# Altium PCB waffling60-MXHS.PcbDoc (part 2 of 3)
Units mm, origin at the board's own origin, x right, y up, seen from the top; angles counter-clockwise.
Board outline 284.81 x 94.3 mm, 2 copper layers (Component Side, Bottom Layer), stack 1.571 mm thick; 157 components, 101 nets, 956 pads, 124 vias.
Unrouted connection lines stored in the file: 1.
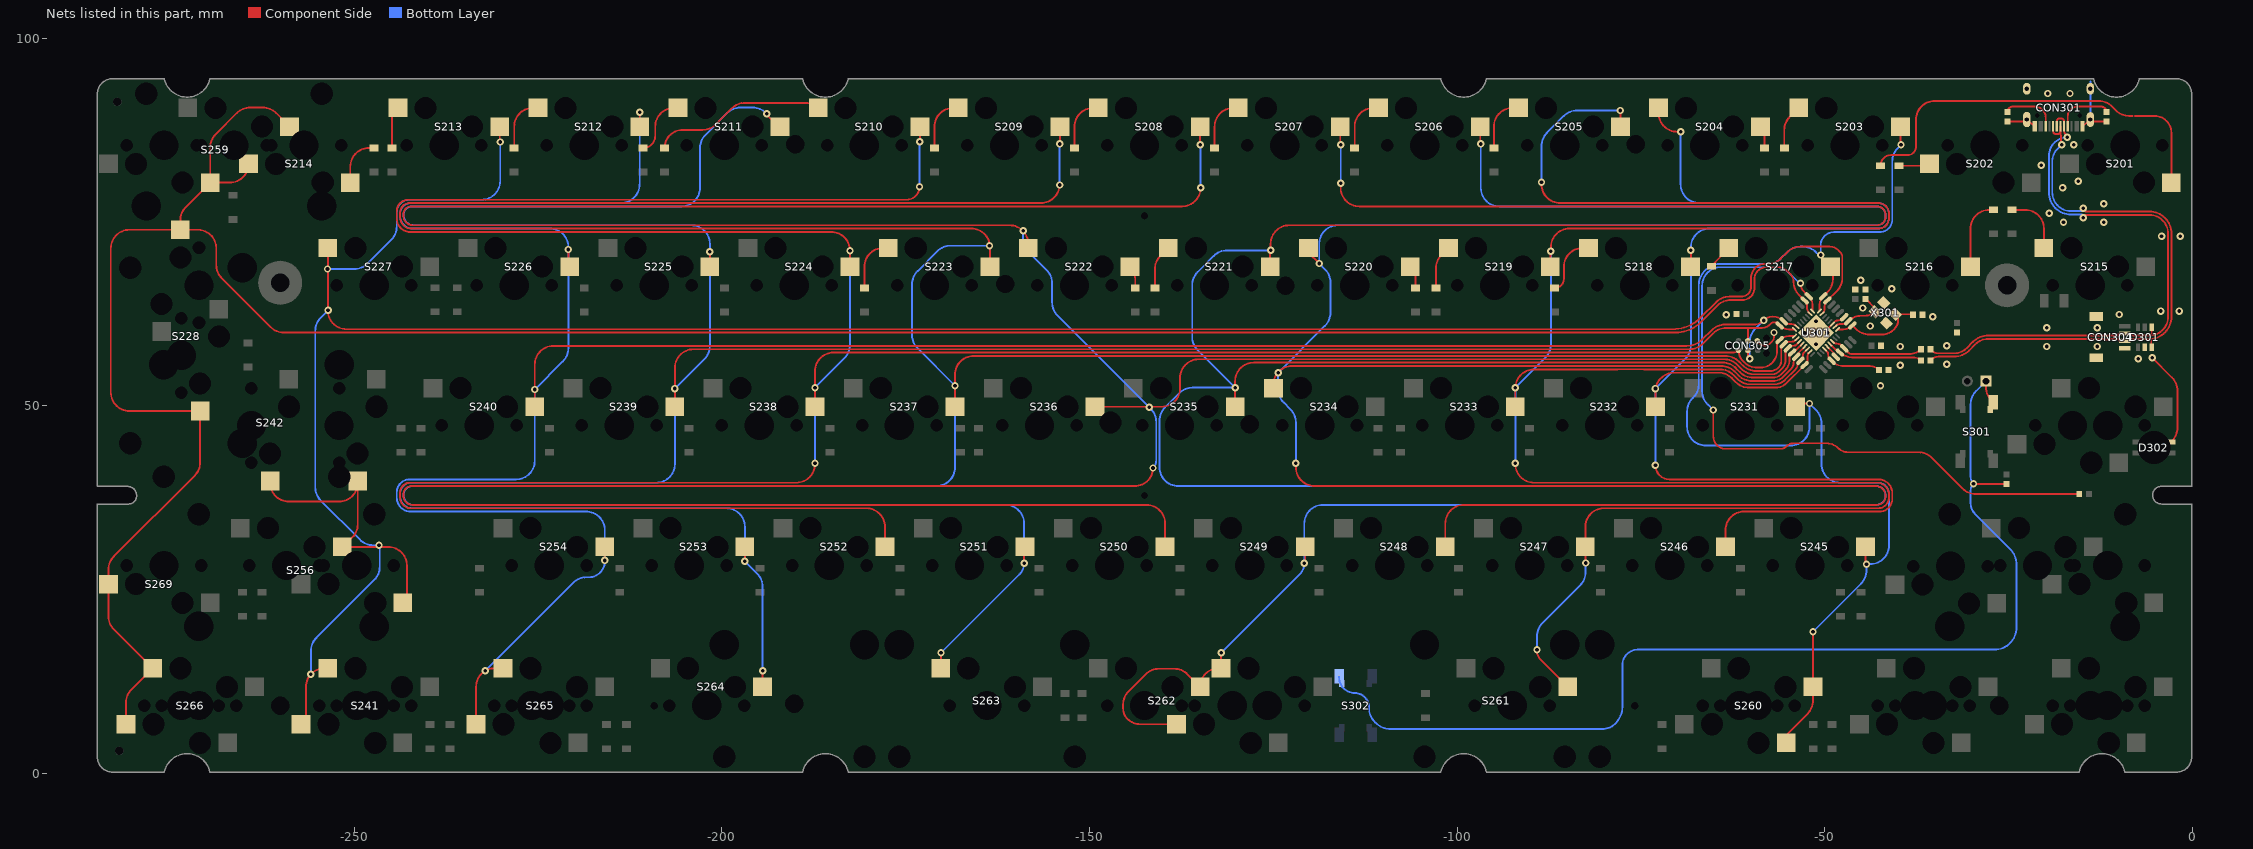
[diagram p2: the nets of this part, all layers, seen from the top]

## Via types
v1: diameter 1, hole 0.5, Component Side to Bottom Layer, tented both sides, 119 vias
v2: diameter 1, hole 0.5, Component Side to Bottom Layer, tented bottom, 5 vias

## Nets (pads, with @x,y where several pads share a name; then routed paths per layer and width w, separated by ;. In a path a pad name is that pad's centre, name@x,y a point inside that pad or via, vN(x,y) a via of type N, cw(c..) or ccw(c..) an arc to the next point about the centre after c; other vN are vias at no path point) (continued)
col3: S203.2 S217.2 S231.2 S245.2 S260.2 U301.8 | length 161.5
  Component Side w0.254: S260.2@-55.247,4.135 -55.247,5.205 -52.34,8.112 ccw(c-54.136,9.908) -51.596,9.908 S260.2@-51.596,11.755 v1(-51.596,19.27) ; S231.2@-53.977,49.855 -53.54,50.292 v1(-52.07,50.292) ; U301.8@-50.725,62.852 -50.725,63.587 cw(c-48.914,63.587) U301.8@-50.194,64.868 -49.639,65.423 ccw(c-51.435,67.219) -48.895,67.219 -48.895,68.132 ccw(c-49.988,68.132) S217.2@-49.215,68.905 -50.546,70.236 v1(-50.546,70.485) ; S245.2@-44.452,30.805 -44.452,28.577 ccw(c-44.323,28.577) v1(-44.323,28.448) ; S203.2@-39.69,87.955 -39.69,85.537 ccw(c-39.624,85.537) v1(-39.624,85.471)
  Bottom Layer w0.254: v1(-51.596,19.27) -45.067,25.799 ccw(c-46.863,27.595) -44.323,27.595 v1(-44.323,28.448) -43.805,28.448 ccw(c-43.805,30.988) -41.265,30.988 -41.265,37.978 ccw(c-42.812,37.978) -41.43,38.674 ccw(c-42.812,37.978) -42.116,39.36 ccw(c-42.812,37.978) -42.812,39.525 -47.897,39.525 cw(c-47.897,42.065) -50.437,42.065 -50.437,47.607 ccw(c-52.977,47.607) -51.181,49.403 v1(-52.07,50.292) -52.07,47.117 cw(c-54.61,47.117) -54.61,44.577 -66.167,44.577 cw(c-66.167,47.117) -68.707,47.117 -68.707,49.24 cw(c-66.167,49.24) -67.963,51.036 -67.818,51.181 ccw(c-69.481,52.844) -67.129,52.844 -67.129,66.421 cw(c-64.589,66.421) -66.731,67.786 ccw(c-66.945,67.923) -66.725,67.795 cw(c-64.135,66.294) -64.277,69.285 cw(c-64.135,66.294) -64.135,69.288 -57.748,69.288 ccw(c-57.748,71.828) -55.952,70.032 -55.1,70.884 cw(c-53.304,69.088) -53.304,71.628 -52.99,71.628 cw(c-52.99,69.088) -51.194,70.884 v1@-50.743,70.433 ; v1(-50.546,70.485) -50.546,71.815 cw(c-48.759,71.815) -50.222,72.841 cw(c-48.759,71.815) -48.759,73.602 cw(c-48.382,71.09) -48.382,73.63 -42.497,73.63 ccw(c-42.497,75.316) -42.026,73.697 ccw(c-42.497,75.316) -40.878,74.845 ccw(c-42.497,75.316) -40.811,75.316 -40.811,83.232 cw(c-38.271,83.232) -40.067,85.028 v1(-39.624,85.471)
col4: S204.2 S218.2 S232.2 S246.2 U301.23 | length 196.7
  Component Side w0.254: S232.2@-73.027,49.855 -73.027,51.943 cw(c-70.487,51.943) -70.487,54.483 -64.425,54.483 cw(c-64.425,51.943) -62.629,53.739 -62.085,53.195 ccw(c-60.289,54.991) -60.289,52.451 -56.64,52.451 ccw(c-56.64,54.424) -55.254,53.02 ; v1(-73.025,41.91) ccw(c-71.094,41.91) -71.094,39.979 -42.695,39.979 cw(c-42.695,38.095) -41.932,39.818 cw(c-42.695,38.095) -40.972,38.858 cw(c-42.695,38.095) -40.811,38.095 -40.811,37.343 cw(c-42.553,37.343) -40.899,36.795 cw(c-42.553,37.343) -42.005,35.689 cw(c-42.553,37.343) -42.553,35.601 -60.962,35.601 ccw(c-60.962,33.061) -63.502,33.061 S246.2@-63.502,30.805 ; S204.2@-72.59,90.495 -72.59,89.789 ccw(c-70.05,89.789) -70.05,87.249 v1(-69.596,87.249) ; S218.2@-68.265,68.905 -68.199,68.971 v1(-68.199,71.12) ; -55.245,53.029 cw(c-56.64,54.424) -55.254,53.02 ; U301.23@-51.997,57.337 -52.153,57.181 ccw(c-51.741,56.769) -52.324,56.769 -52.324,56.321 cw(c-53.141,56.321) -52.563,55.743 cw(c-53.689,56.515) -52.724,55.55 U301.23@-52.74,55.534 -55.254,53.02
  Bottom Layer w0.254: v1(-73.025,41.91) v1(-73.025,52.324) -68.943,56.406 ccw(c-70.739,58.202) -68.199,58.202 v1(-68.199,71.12) -68.199,71.544 cw(c-65.659,71.544) -65.659,74.084 -42.685,74.084 ccw(c-42.685,75.504) -42.194,74.172 ccw(c-42.685,75.504) -41.353,75.013 ccw(c-42.685,75.504) -41.265,75.504 -41.265,76.134 ccw(c-42.685,76.134) -41.353,76.625 ccw(c-42.685,76.134) -42.194,77.466 ccw(c-42.685,76.134) -42.685,77.554 -67.056,77.554 cw(c-67.056,80.094) -69.596,80.094 v1(-69.596,87.249)
col5: pad.@-75.692,85.542 S205.2 S219.2 S233.2 S247.2 S261.2 U301.22 | length 321.8
  Component Side w0.254: v1@-92.266,42.355 v1(-92.075,42.164) -92.075,42.065 ccw(c-89.535,42.065) -89.535,39.525 -42.883,39.525 cw(c-42.883,37.907) -42.051,39.295 cw(c-42.883,37.907) -41.495,38.739 cw(c-42.883,37.907) -41.265,37.907 -41.265,37.531 cw(c-42.741,37.531) -41.383,36.954 cw(c-42.741,37.531) -42.164,36.173 cw(c-42.741,37.531) -42.741,36.055 -80.012,36.055 ccw(c-80.012,33.515) -80.16,36.051 ccw(c-80.012,33.515) -82.548,33.663 ccw(c-80.012,33.515) -82.552,33.515 S247.2@-82.552,30.805 v1@-82.552,28.831 ; S233.2@-92.077,49.855 -92.077,52.389 cw(c-89.537,52.389) -89.537,54.929 -78.144,54.929 -78.121,54.951 -74.631,54.951 -74.616,54.937 -64.237,54.937 cw(c-64.237,52.397) -62.441,54.193 -61.897,53.649 ccw(c-60.101,55.445) -60.101,52.905 -56.702,52.905 ccw(c-56.896,55.012) -55.4,53.516 -54.029,54.887 ; v1@-89.154,16.764 ccw(c-87.251,16.764) -88.597,15.418 S261.2@-84.933,11.755 ; v1(-88.519,80.391) -88.519,80.094 ccw(c-85.979,80.094) -85.979,77.554 -42.685,77.554 cw(c-42.685,76.134) -42.194,77.466 cw(c-42.685,76.134) -41.353,76.625 cw(c-42.685,76.134) -41.265,76.134 -41.265,75.504 cw(c-42.685,75.504) -41.353,75.013 cw(c-42.685,75.504) -42.194,74.172 cw(c-42.685,75.504) -42.685,74.084 -84.709,74.084 ccw(c-84.709,71.544) -87.249,71.544 v1(-87.249,70.993) ; S219.2@-87.315,68.905 v1@-87.315,70.927 ; S205.2@-77.79,87.955 v1(-77.79,90.15) ; -54.028,54.888 ccw(c-54.961,55.82) U301.22@-53.642,55.82 ; U301.22@-53.306,56.1 -53.294,56.111 ccw(c-54.078,56.896) -52.969,56.896 cw(c-52.542,56.896) -52.844,57.198 U301.22@-52.351,57.691
  Bottom Layer w0.254: v1(-92.075,42.164) v1(-92.075,52.451) -87.993,56.533 ccw(c-89.789,58.329) -87.249,58.329 v1(-87.249,70.993) ; v1(-89.121,16.797) -89.121,18.666 cw(c-86.581,18.666) -88.377,20.462 -83.261,25.578 ccw(c-85.057,27.374) -82.517,27.374 v1(-82.517,28.608) ; v1(-88.519,80.391) -88.519,85.308 cw(c-85.979,85.308) -87.775,87.104 -85.473,89.406 cw(c-83.677,87.61) -83.677,90.15 v1(-77.79,90.15)
col6: S206.2 S220.2 S234.2 S248.2 U301.21 | length 406.7
  Component Side w0.254: S234.2@-124.977,52.395 -124.977,52.865 cw(c-122.437,52.865) -122.437,55.405 -74.443,55.405 -74.428,55.391 -64.049,55.391 cw(c-64.049,52.851) -62.253,54.647 -61.709,54.103 ccw(c-59.913,55.899) -59.913,53.359 -56.836,53.359 ccw(c-57.023,55.318) -55.631,53.927 -54.673,54.885 ; v1(-121.92,42.164) -121.92,41.611 ccw(c-119.38,41.611) -119.38,39.071 -43.071,39.071 cw(c-43.071,37.719) -41.719,37.719 cw(c-42.929,37.719) -41.907,37.072 cw(c-42.929,37.719) -42.282,36.697 cw(c-42.929,37.719) -42.929,36.509 -99.062,36.509 ccw(c-99.062,33.969) -101.602,33.969 S248.2@-101.602,30.805 ; S220.2@-120.215,71.445 -120.215,70.812 v1(-118.745,69.342) ; S206.2@-96.84,87.955 -96.84,85.664 ccw(c-96.774,85.664) v1(-96.774,85.598) ; -54.672,54.886 ccw(c-55.795,56.007) -54.208,56.007 U301.21@-54.208,56.385 ; U301.21@-53.871,56.665 cw(c-53.359,56.665) -53.721,57.027 U301.21@-52.705,58.044
  Bottom Layer w0.254: v1@-121.92,42.037 v1(-121.92,42.164) -121.92,47.716 ccw(c-124.46,47.716) -122.664,49.512 -123.589,50.437 cw(c-121.793,52.233) -124.333,52.233 v1(-124.333,54.483) -117.965,60.851 ccw(c-119.761,62.647) -117.221,62.647 -117.221,66.766 ccw(c-119.761,66.766) -117.965,68.562 v1(-118.745,69.342) -118.745,71.998 cw(c-116.205,71.998) -118.744,72.072 cw(c-116.205,71.998) -116.279,74.537 cw(c-116.205,71.998) -116.205,74.538 -42.873,74.538 ccw(c-42.873,75.692) -42.338,74.67 ccw(c-42.873,75.692) -41.851,75.157 ccw(c-42.873,75.692) -41.719,75.692 -41.719,75.946 ccw(c-42.873,75.946) -41.851,76.481 ccw(c-42.873,75.946) -42.338,76.968 ccw(c-42.873,75.946) -42.873,77.1 -94.234,77.1 cw(c-94.234,79.64) -96.774,79.64 v1(-96.774,85.598)
col7: S207.2 S221.2 S235.2 S249.2 S262.1 U301.20 | length 542.1
  Component Side w0.254: S262.1@-138.463,6.675 -143.037,6.675 cw(c-143.037,9.215) -144.833,7.419 cw(c-143.428,8.824) -145.415,8.824 -145.415,9.362 cw(c-142.875,9.362) -144.671,11.158 -142.349,13.48 cw(c-140.553,11.684) -140.553,14.224 -138.461,14.224 cw(c-138.461,11.684) -136.665,13.48 S262.1@-134.939,11.755 cw(c-132.399,11.755) -132.399,14.295 S262.1@-132.113,14.295 -132.113,16.35 v1(-132.08,16.383) ; S235.2@-130.177,49.855 -130.177,52.451 -130.177,53.319 cw(c-127.637,53.319) -127.637,55.859 -63.875,55.859 cw(c-63.875,53.319) -62.079,55.116 -61.521,54.557 ccw(c-59.725,56.353) -59.725,53.813 -57.023,53.813 ccw(c-57.023,55.349) -55.937,54.263 -55.354,54.846 ccw(c-56.755,56.247) -54.774,56.247 U301.20@-54.774,56.951 ; S221.2@-125.415,68.905 -125.415,71.054 v1(-125.349,71.12) -125.349,71.998 cw(c-122.809,71.998) -122.809,74.538 -42.873,74.538 ccw(c-42.873,75.692) -42.338,74.67 ccw(c-42.873,75.692) -41.851,75.157 ccw(c-42.873,75.692) -41.719,75.692 -41.719,75.946 ccw(c-42.873,75.946) -41.851,76.481 ccw(c-42.873,75.946) -42.338,76.968 ccw(c-42.873,75.946) -42.873,77.1 -113.284,77.1 cw(c-113.284,79.64) -115.824,79.64 v1(-115.824,80.264) ; S249.2@-120.652,30.805 -120.652,28.577 v1@-120.65,28.575 ; S207.2@-115.89,87.955 -115.89,85.537 ccw(c-115.824,85.537) v1(-115.824,85.471) ; U301.20@-54.437,57.231 ccw(c-54.437,57.743) -54.075,57.381 U301.20@-53.058,58.398
  Bottom Layer w0.254: v1(-132.08,16.383) -121.406,27.057 ccw(c-122.923,28.575) v1(-120.777,28.575) -120.777,33.969 cw(c-118.237,33.969) -118.237,36.509 -43,36.509 ccw(c-43,37.79) -42.096,36.883 ccw(c-43,37.79) -42.093,36.886 ccw(c-43,37.79) -41.719,37.79 ccw(c-43,37.79) -42.092,38.694 ccw(c-43,37.79) -42.096,38.698 ccw(c-43,37.79) -43,39.071 -137.922,39.071 cw(c-137.922,41.611) -140.462,41.611 -140.462,47.97 cw(c-137.922,47.97) -139.718,49.766 -137.777,51.707 cw(c-135.981,49.911) -135.981,52.451 v1(-130.175,52.451) -135.273,57.549 cw(c-133.477,59.345) -136.017,59.345 -136.017,66.385 cw(c-133.477,66.385) -135.273,68.181 -133.078,70.376 cw(c-131.282,68.58) -131.282,71.12 v1(-125.349,71.12) ; v1(-115.824,80.264) v1(-115.824,85.471)
col8: pad.@-147.123,47.742 S208.2 S222.2 S236.2 S250.2 U301.19 | length 563
  Component Side w0.254: S222.2@-158.315,71.445 -158.315,71.998 ccw(c-160.855,71.998) -160.855,74.538 -242,74.538 cw(c-242,75.819) -242.904,74.911 cw(c-242,75.819) -242.908,74.915 cw(c-242,75.819) -243.281,75.819 -243.281,76.073 cw(c-242.254,76.073) -243.226,76.405 cw(c-242.254,76.073) -242.586,77.045 cw(c-242.254,76.073) -242.254,77.1 -137.414,77.1 ccw(c-137.414,79.64) v1(-134.874,79.64) ; S236.2@-149.227,49.855 -141.859,49.855 -140.098,49.855 ccw(c-140.098,52.214) -138.43,50.546 -138.412,50.564 ccw(c-140.208,52.36) -137.668,52.36 -137.668,53.773 cw(c-135.128,53.773) -135.128,56.313 -63.687,56.313 cw(c-63.687,53.773) -61.891,55.57 -61.333,55.011 ccw(c-59.537,56.807) -59.537,54.267 -57.269,54.267 ccw(c-57.269,55.999) -56.225,54.617 -55.851,54.991 ; v1(-141.351,41.529) cw(c-143.809,41.529) -143.809,39.071 -242.183,39.071 ccw(c-242.183,37.973) -242.622,38.979 ccw(c-242.183,37.973) -243.189,38.412 ccw(c-242.183,37.973) -243.281,37.973 -243.281,37.719 ccw(c-242.071,37.719) -243.093,37.072 ccw(c-242.071,37.719) -242.718,36.697 ccw(c-242.071,37.719) -242.071,36.509 -142.242,36.509 cw(c-142.242,33.969) -139.702,33.969 S250.2@-139.702,30.805 ; S208.2@-134.94,87.955 v1(-134.94,85.503) ccw(c-134.715,85.503) v1@-134.874,85.344 ; -55.85,54.992 ccw(c-57.086,56.226) -55.339,56.226 U301.19@-55.339,57.517 ; U301.19@-54.739,58.06 U301.19@-55.003,57.797 cw(c-54.111,56.905) -54.111,58.166 -54.102,58.166 ccw(c-54.102,58.42) -53.923,58.24 U301.19@-53.412,58.751
  Bottom Layer w0.254: v1(-159.004,73.787) -159.004,72.68 ccw(c-156.464,72.68) -158.26,70.884 -155.811,68.435 cw(c-157.607,66.639) -155.067,66.639 -155.067,64.044 ccw(c-152.527,64.044) -154.323,62.248 v1(-141.859,49.784) -141.66,49.585 cw(c-143.456,47.789) -140.916,47.789 -140.916,42.579 cw(c-142.401,42.579) v1(-141.351,41.529) ; v1(-134.94,85.503) cw(c-134.94,85.437) -134.874,85.437 v1(-134.874,79.64)
col9: pad.@-161.423,66.548 S209.2 S223.2 S237.2 S251.2 S263.2 U301.18 | length 539.9
  Component Side w0.254: S263.2@-170.221,14.295 -170.18,14.336 v1(-170.18,16.383) ; S237.2@-168.277,49.855 -168.277,52.705 -168.277,54.227 cw(c-165.737,54.227) -165.737,56.767 -63.499,56.767 cw(c-63.499,54.227) -61.703,56.024 -61.145,55.465 ccw(c-59.349,57.261) -59.349,54.721 -57.37,54.721 ccw(c-57.37,56.186) -56.334,55.15 ; S223.2@-163.515,68.905 -163.515,71.544 ccw(c-166.055,71.544) -166.055,74.084 -242.188,74.084 cw(c-242.188,75.631) -242.884,74.249 cw(c-242.188,75.631) -243.57,74.935 cw(c-242.188,75.631) -243.735,75.631 -243.735,76.261 cw(c-242.442,76.261) -243.696,76.577 cw(c-242.442,76.261) -242.758,77.515 cw(c-242.442,76.261) -242.442,77.554 -156.591,77.554 ccw(c-156.591,80.094) v1@-154.051,80.094 ; v1(-158.877,28.575) -158.877,30.68 S251.2@-158.752,30.805 ; v1(-154.051,85.598) ccw(c-154.051,85.659) -153.99,85.659 S209.2@-153.99,87.955 ; -56.333,55.151 ccw(c-57.37,56.186) -55.905,56.186 U301.18@-55.905,58.082 ; U301.18@-55.568,58.363 cw(c-54.755,57.549) -54.991,58.675 cw(c-54.932,58.616) -54.932,58.699 -54.483,58.699 ccw(c-54.483,59.453) -53.95,58.92 U301.18@-53.765,59.105
  Bottom Layer w0.254: v1(-170.18,16.383) -159.506,27.057 ; v1(-163.576,71.755) -168.874,71.755 ccw(c-168.874,69.215) -170.67,71.011 -173.373,68.308 ccw(c-171.577,66.512) -174.117,66.512 -174.117,59.599 ccw(c-171.577,59.599) -173.373,57.803 v1(-168.275,52.705) -168.275,41.611 cw(c-170.815,41.611) -170.815,39.071 -242.056,39.071 ccw(c-242.056,37.846) -242.738,38.864 ccw(c-242.056,37.846) -243.074,38.528 ccw(c-242.056,37.846) -243.281,37.846 ccw(c-241.944,37.846) -241.944,36.509 -161.417,36.509 cw(c-161.417,33.969) -158.877,33.969 v1(-158.877,28.575) cw(c-161.023,28.575) -159.505,27.058 ; v1(-154.051,80.01) v1(-154.051,85.598)
col10: CON305.1 S210.2 S224.2 S238.2 S252.2 U301.17 | length 452.9
  Component Side w0.254: S238.2@-187.327,49.855 -187.327,52.451 -187.327,54.681 cw(c-184.787,54.681) -184.787,57.221 -62.469,57.221 ccw(c-62.469,58.278) CON305.1@-61.722,57.531 ccw(c-59.678,57.531) -61.124,56.086 ; v1(-187.325,42.164) -187.325,42.065 cw(c-189.865,42.065) -189.865,39.525 -242.371,39.525 ccw(c-242.371,38.161) -242.782,39.462 ccw(c-242.371,38.161) -243.672,38.572 ccw(c-242.371,38.161) -243.735,38.161 -243.735,37.531 ccw(c-242.259,37.531) -243.617,36.954 ccw(c-242.259,37.531) -242.836,36.173 ccw(c-242.259,37.531) -242.259,36.055 -180.342,36.055 cw(c-180.342,33.515) -177.802,33.515 S252.2@-177.802,30.805 ; S224.2@-182.565,68.905 v1(-182.565,71.09) ccw(c-185.105,71.09) -185.105,73.63 -242.376,73.63 cw(c-242.376,75.443) -243.028,73.751 cw(c-242.376,75.443) -244.068,74.791 cw(c-242.376,75.443) -244.189,75.443 -244.189,76.449 cw(c-242.63,76.449) -244.158,76.756 cw(c-242.63,76.449) -242.937,77.977 cw(c-242.63,76.449) -242.63,78.008 -174.849,78.008 ccw(c-174.849,79.756) v1(-173.101,79.756) ; v1@-173.101,85.852 ccw(c-173.248,85.999) -173.04,85.999 S210.2@-173.04,87.955 ; -61.123,56.086 -60.957,55.919 ccw(c-59.161,57.715) -59.161,55.175 -58.732,55.175 ccw(c-58.732,57.413) -57.151,55.83 ; -57.15,55.83 ccw(c-58.79,57.47) -56.471,57.47 U301.17@-56.471,58.648 ; U301.17@-56.134,58.928 cw(c-54.854,57.648) -54.854,59.458 U301.17@-54.119,59.458
  Bottom Layer w0.254: v1(-187.325,42.164) v1(-187.325,52.451) -183.309,56.467 ccw(c-185.105,58.263) -182.565,58.263 v1(-182.565,71.09) ; v1(-173.101,79.756) -173.101,80.645 ; v1(-173.068,85.885) -173.101,85.852 -173.101,80.645 ; -173.101,80.645 ccw(c-173.101,80.678) -173.068,80.678 -173.101,80.645
col11: CON305.4 pad.@-189.992,85.542 S211.2 S225.2 S239.2 S253.2 S264.2 U301.16 | length 416.2
  Component Side w0.254: S239.2@-206.377,49.855 -206.377,52.324 -206.377,55.135 cw(c-203.837,55.135) -203.837,57.675 -68.381,57.675 ccw(c-68.381,60.215) -66.585,58.419 -65.169,59.835 cw(c-63.373,58.039) -63.373,60.579 -60.452,60.579 ; S225.2@-201.615,68.905 v1(-201.615,70.927) ; S253.2@-196.852,30.805 -196.852,28.831 v1(-196.85,28.829) ; S264.2@-194.471,11.755 -194.471,13.76 cw(c-194.354,13.76) v1@-194.437,13.843 ; v1@-193.929,89.662 -192.222,87.955 S211.2@-192.09,87.955 ; CON305.4@-60.452,58.801 -60.452,60.579 ; U301.16@-54.119,60.378 -54.854,60.378 cw(c-54.854,62.188) U301.16@-56.134,60.908 -56.335,61.108 ccw(c-56.896,60.547) -56.896,61.341 ccw(c-56.896,60.728) -57.33,61.161 -57.463,61.028 cw(c-58.547,62.112) -58.547,60.579 -60.452,60.579
  Bottom Layer w0.254: v1(-194.437,13.97) -194.437,25.364 ccw(c-196.977,25.364) -195.181,27.16 v1(-196.85,28.829) -196.85,33.515 ccw(c-199.39,33.515) -199.39,36.055 -242.132,36.055 cw(c-242.132,37.658) -242.933,36.27 cw(c-242.132,37.658) -243.52,36.857 cw(c-242.132,37.658) -243.735,37.658 -243.735,38.034 cw(c-242.244,38.034) -243.608,38.635 cw(c-242.244,38.034) -242.845,39.398 cw(c-242.244,38.034) -242.244,39.525 -208.915,39.525 ccw(c-208.915,42.065) -206.375,42.065 v1(-206.375,52.324) -202.359,56.34 ccw(c-204.155,58.136) -201.615,58.136 v1(-201.615,70.927) -201.615,71.998 ccw(c-204.155,71.998) -204.155,74.538 -241.873,74.538 cw(c-241.873,75.946) -243.281,75.946 cw(c-242.127,75.946) -243.149,76.481 cw(c-242.127,75.946) -242.662,76.968 cw(c-242.127,75.946) -242.127,77.1 -205.486,77.1 ccw(c-205.486,79.64) -202.946,79.64 -202.946,85.054 cw(c-200.406,85.054) -202.202,86.85 -199.245,89.807 cw(c-197.449,88.011) -197.449,90.551 -195.804,90.551 cw(c-195.804,88.011) -194.008,89.807 v1(-193.896,89.695)
col12: CON305.3 S212.2 S226.2 S240.2 S254.2 S265.2 U301.15 | length 384.5
  Component Side w0.254: S265.2@-233.403,6.675 -233.403,11.755 cw(c-230.863,11.755) -230.863,14.295 S265.2@-229.752,14.295 ; S240.2@-225.427,49.855 -225.427,52.197 -225.427,55.589 cw(c-222.887,55.589) -222.887,58.129 -68.757,58.129 ccw(c-68.757,61.123) -66.641,59.006 ; v1(-220.853,71.247) -220.853,69.359 ccw(c-220.211,69.359) S226.2@-220.665,68.905 ; S254.2@-215.902,30.805 -215.902,28.958 v1(-215.9,28.956) ; S212.2@-211.14,87.955 v1(-211.14,89.884) cw(c-210.915,89.884) v1@-211.074,90.043 ; -66.64,59.006 -65.357,60.289 cw(c-63.561,58.493) -63.561,61.033 -59.65,61.033 ccw(c-59.65,62.952) v1(-58.293,61.595) cw(c-57.067,60.369) -57.067,62.103 cw(c-57.067,60.005) -55.583,61.489 U301.15@-55.568,61.474 ccw(c-54.635,62.407) -54.635,61.087 -54.483,61.087 cw(c-54.483,60.213) -53.865,60.831 U301.15@-53.765,60.731 ; v1@-60.452,56.642 CON305.3@-60.452,57.531
  Bottom Layer w0.254: v1(-232.156,13.97) -220.2,25.926 cw(c-218.404,24.13) -218.404,26.67 -218.059,26.67 ccw(c-218.059,28.829) -215.9,28.829 v1(-215.9,28.956) -215.9,33.061 ccw(c-218.44,33.061) -215.91,33.29 ccw(c-218.44,33.061) -218.211,35.591 ccw(c-218.44,33.061) -218.44,35.601 -242.32,35.601 cw(c-242.32,37.47) -243.059,35.753 cw(c-242.32,37.47) -244.037,36.731 cw(c-242.32,37.47) -244.189,37.47 -244.189,38.222 cw(c-242.432,38.222) -244.094,38.792 cw(c-242.432,38.222) -243.002,39.884 cw(c-242.432,38.222) -242.432,39.979 -227.965,39.979 ccw(c-227.965,42.519) -225.425,42.519 v1(-225.425,52.197) -221.597,56.025 ccw(c-223.393,57.821) -220.853,57.821 v1(-220.853,71.247) -220.853,71.544 ccw(c-223.393,71.544) -223.393,74.084 -242.061,74.084 cw(c-242.061,75.758) -243.022,74.387 cw(c-242.061,75.758) -243.432,74.797 cw(c-242.061,75.758) -243.735,75.758 -243.735,76.134 cw(c-242.315,76.134) -243.647,76.625 cw(c-242.315,76.134) -242.806,77.466 cw(c-242.315,76.134) -242.315,77.554 -213.708,77.554 ccw(c-213.708,80.094) -211.168,80.094 -211.14,80.122 v1(-211.14,89.884) ; v1(-60.198,56.388) -60.198,58.638 cw(c-57.658,58.638) -59.454,60.434 v1(-58.293,61.595)
col13: S213.2 S227.2 S241.1 S242.2 S256.2 U301.7 | length 377.7
  Component Side w0.254: S242.2@-261.41,39.755 -261.41,39.497 ccw(c-258.87,39.497) -258.87,36.957 -252.044,36.957 ccw(c-252.044,39.497) S242.2@-249.504,39.497 ; S241.1@-257.216,6.675 ccw(c-257.216,7.351) -256.54,7.351 -256.54,11.755 cw(c-254,11.755) -254,14.295 S241.1@-253.564,14.295 ; S227.2@-253.565,71.445 -253.565,68.58 -253.565,62.973 -253.565,62.939 ccw(c-251.025,62.939) -251.025,60.399 -70.637,60.399 ccw(c-70.637,65.663) -66.915,61.941 -64.703,64.153 ; S242.2@-249.504,39.755 S242.2@-249.504,39.497 ; S256.2@-242.254,23.185 -243.265,23.185 ccw(c-243.265,23.626) -242.824,23.626 -242.824,28.265 ccw(c-245.364,28.265) -245.364,30.805 -246.601,30.805 -251.52,30.805 -250.248,32.077 ccw(c-252.044,33.873) -249.504,33.873 S242.2@-249.504,39.497 ; S213.2@-230.19,87.955 -230.19,85.918 ccw(c-230.124,85.918) v1(-230.124,85.852) ; -64.702,64.152 cw(c-62.977,62.287) -62.977,64.827 -61.357,64.827 ccw(c-61.357,66.167) -60.984,64.88 ccw(c-61.357,66.167) -60.07,65.794 ccw(c-61.357,66.167) -60.017,66.167 -60.017,67.371 cw(c-58.1,67.371) -59.833,68.19 cw(c-58.1,67.371) -58.919,69.104 cw(c-58.1,67.371) -58.1,69.288 -57.748,69.288 ccw(c-57.748,71.828) -55.952,70.032 -55.1,70.884 cw(c-53.304,69.088) -53.304,71.628 -49.359,71.628 cw(c-49.359,69.894) -48.133,71.12 -47.874,70.861 cw(c-48.504,70.231) -47.613,70.231 -47.613,67.37 cw(c-50.153,67.37) -48.357,65.574 U301.7@-49.629,64.302 ccw(c-48.64,63.314) -50.038,63.314 -50.038,63.119 cw(c-50.731,63.119) -50.241,62.629 U301.7@-50.371,62.499
  Bottom Layer w0.254: v1(-255.872,13.495) -255.872,16.634 cw(c-253.332,16.634) -255.128,18.43 -247.251,26.307 ccw(c-249.047,28.103) -246.507,28.103 v1@-246.507,30.734 ; v1(-253.619,68.58) -249.972,68.58 ccw(c-249.972,71.12) -248.176,69.324 -244.945,72.555 ccw(c-246.741,74.351) -244.201,74.351 -244.201,75.558 ; v1(-253.532,62.973) -254.526,61.978 ccw(c-252.73,60.182) -255.27,60.182 -255.27,38.898 ccw(c-252.73,38.898) -254.526,37.102 -249.189,31.765 ccw(c-247.393,33.561) -247.393,31.021 v1(-246.601,31.021) ; -244.189,75.57 -244.189,76.322 cw(c-242.503,76.322) -244.122,76.793 cw(c-242.503,76.322) -242.974,77.941 cw(c-242.503,76.322) -242.503,78.008 -232.664,78.008 ccw(c-232.664,80.548) -230.124,80.548 v1(-230.124,85.852)
col14: S214.2 S228.2 S259.2 S266.2 S269.2 U301.10 | length 367.2
  Component Side w0.254: S266.2@-281.028,6.675 -281.028,9.592 cw(c-278.488,9.592) -280.284,11.388 S266.2@-277.377,14.295 -282.666,19.584 cw(c-280.87,21.38) -283.41,21.38 S269.2@-283.41,25.725 -283.41,27.704 cw(c-280.87,27.704) -282.666,29.5 -271.673,40.493 ccw(c-273.469,42.289) -270.929,42.289 S228.2@-270.929,49.28 -280.543,49.28 cw(c-280.543,51.82) -283.083,51.82 -283.083,71.385 cw(c-280.543,71.385) -280.543,73.925 S228.2@-273.627,73.925 ; S214.2@-264.36,82.875 cw(c-266.9,82.875) -266.9,80.335 S259.2@-269.56,80.335 ; S259.2@-258.765,87.955 -260.617,89.807 ccw(c-262.413,88.011) -262.413,90.551 -264.124,90.551 ccw(c-264.124,88.011) -265.92,89.807 -268.816,86.911 ccw(c-267.02,85.115) -269.56,85.115 S259.2@-269.56,80.335 ; -64.412,63.803 -66.86,61.354 cw(c-70.261,64.755) -66.862,61.353 cw(c-70.261,64.755) -70.261,59.945 -259.553,59.945 cw(c-259.553,62.485) -261.349,60.689 -267.988,67.328 cw(c-266.192,69.124) -268.732,69.124 -268.732,71.385 ccw(c-271.272,71.385) -268.798,71.959 ccw(c-271.272,71.385) -270.698,73.859 ccw(c-271.272,71.385) -271.272,73.925 S228.2@-273.627,73.925 ; -64.403,63.794 cw(c-62.789,61.833) -62.789,64.373 -61.169,64.373 ccw(c-61.169,65.979) -60.808,64.414 ccw(c-61.169,65.979) -59.604,65.618 ccw(c-61.169,65.979) -59.563,65.979 -59.563,67.183 cw(c-57.912,67.183) -59.293,68.088 cw(c-57.912,67.183) -58.817,68.564 cw(c-57.912,67.183) -57.912,68.834 -56.434,68.834 cw(c-56.434,66.883) -55.055,68.263 -54.678,67.886 cw(c-55.762,66.802) -54.229,66.802 ccw(c-51.789,66.802) -53.515,65.077 ccw(c-51.789,66.802) -53.514,65.076 U301.10@-52.74,64.302 cw(c-53.553,63.489) -52.403,63.489 -52.403,63.246 ccw(c-51.579,63.246) -52.162,62.663 U301.10@-51.997,62.499 ; S228.2@-273.627,73.925 -273.627,75.215 cw(c-271.087,75.215) -272.884,77.011 S259.2@-269.56,80.335
D_N: CON301.A7 CON301.B7 CON304.2 D301.4 R305.2 | length 80.3
  Component Side w0.254: R305.2@-35.62,57.658 -35.47,57.508 ccw(c-34.544,58.435) -34.544,57.125 -32.385,57.125 ccw(c-32.385,59.516) -30.694,57.825 -29.853,58.666 cw(c-27.734,56.546) -27.734,59.544 -10.108,59.544 cw(c-9.837,59.544) -9.837,59.815 CON304.2@-9.206,59.815 -8.688,59.815 cw(c-8.688,58.888) -8.033,59.544 -5.842,59.544 ccw(c-5.842,62.084) -3.302,62.084 -3.302,73.406 ccw(c-5.842,73.406) -5.842,75.946 -14.478,75.946 ccw(c-14.478,75.565) v1(-14.859,75.565) ; CON301.A7@-18.45,88 ccw(c-18.681,88.106) -18.427,88.107 -18.427,88.725 cw(c-18.1,88.725) -18.1,89.052 -17.8,89.052 cw(c-17.8,88.725) -17.473,88.725 -17.473,88.106 ccw(c-17.219,88.106) CON301.B7@-17.45,88 -17.427,87.265 ccw(c-17.1,87.275) -17.382,87.11 v1(-17.018,86.487) ; -5.842,59.547 -5.527,59.862 D301.4@-5.527,60.684
  Bottom Layer w0.254: v1(-17.018,86.487) ccw(c-17.018,83.998) -19.507,83.998 -19.507,78.994 ccw(c-16.51,78.994) -16.51,75.997 v1@-14.986,75.997
D_P: CON301.A6 CON301.B6 CON304.3 D301.3 R306.2 | length 80.3
  Component Side w0.254: R306.2@-35.62,56.134 -35.47,56.284 cw(c-34.544,55.357) -34.544,56.667 -32.385,56.667 ccw(c-32.385,59.516) -30.371,57.502 -29.53,58.342 cw(c-27.734,56.546) -27.734,59.086 -14.478,59.086 -12.827,59.086 -11.938,59.086 -11.938,58.998 -11.176,58.998 -11.176,59.086 -10.541,59.086 -10.108,59.086 ccw(c-9.837,59.086) -9.837,58.815 CON304.3@-9.206,58.815 -8.688,58.815 ccw(c-8.688,59.742) -8.033,59.086 -5.842,59.086 ccw(c-5.842,62.084) -2.845,62.084 -2.845,73.406 ccw(c-5.842,73.406) -5.842,76.403 -14.427,76.403 cw(c-14.427,76.835) v1(-14.859,76.835) ; CON301.B6@-18.95,88 cw(c-19.181,87.894) -18.927,87.894 -18.927,87.275 ccw(c-18.6,87.275) -18.6,86.948 -18.3,86.948 ccw(c-18.3,87.275) -17.973,87.275 -17.973,87.894 cw(c-17.719,87.894) CON301.A6@-17.95,88 -17.927,87.265 ccw(c-17.6,87.275) -17.926,87.248 v1(-17.78,85.471) cw(c-17.78,85.641) v1@-17.95,85.641 ; -5.592,59.072 -5.592,58.17 -5.527,58.105 D301.3@-5.527,57.934
  Bottom Layer w0.254: v1(-17.78,85.471) -18.421,84.83 ccw(c-16.904,83.312) -19.05,83.312 -19.05,78.994 ccw(c-16.51,78.994) -16.51,76.454 v1@-14.986,76.454
D_PRE_N: R305.1 U301.30 | length 12.8
  Component Side w0.254: U301.30@-48.957,58.751 -48.884,58.679 ccw(c-48.26,59.303) -48.26,58.42 cw(c-48.26,57.766) -47.798,58.229 U301.30@-47.366,57.797 -46.781,57.212 ccw(c-46.325,57.668) -46.325,57.023 -38.481,57.023 ccw(c-38.481,59.191) -36.948,57.658 R305.1@-36.92,57.658
D_PRE_P: R306.1 U301.29 | length 13.1
  Component Side w0.254: U301.29@-49.31,58.398 -48.294,57.381 ccw(c-47.625,58.05) -47.625,57.104 ccw(c-46.326,58.403) -46.326,56.566 -37.962,56.566 cw(c-37.962,55.092) R306.1@-36.92,56.134
GND: C301.1 C302.1 C303.1 C304.1 C305.1 C306.1 C307.1 CON301.A1B12 CON301.B1A12 CON301.S1 CON303.1 CON304.4 CON304.5 CON305.6 D301.2 D302.3 R302.2 R303.2 R304.2 S301.1 S302.1 U301.3 U301.28 X301.2 X301.4 | length 186.2
  Component Side w0.254: CON305.6@-59.182,58.801 -58.83,58.449 ; -58.829,58.448 ccw(c-58.147,59.131) -58.147,58.166 ccw(c-58.147,59.131) -57.465,58.448 ; -57.465,58.449 -57.277,58.636 ; -57.277,58.651 -57.277,58.636 ; v1(-56.896,59.944) -56.896,59.377 cw(c-57.763,59.377) -57.149,58.764 -57.277,58.636 ; v2(-51.184,59.918) -50.124,59.918 U301.3@-48.957,61.085 -48.578,61.463 ; U301.28@-49.664,58.044 U301.28@-48.647,57.027 ; U301.28@-48.647,57.027 cw(c-49.009,56.665) U301.28@-48.497,56.665 ; -48.578,61.463 cw(c-48.26,61.145) -48.26,61.595 ccw(c-48.26,62.681) -47.492,61.913 U301.3@-47.366,62.039 ; v1(-29.774,39.4) ccw(c-29.667,39.507) -29.667,39.355 C307.1@-25.273,39.355 ; CON303.1@-28.067,53.34 -28.067,52.489 ccw(c-25.527,52.489) -27.323,50.693 S301.1@-27.087,50.457 ; R304.2@-25.146,88.631 -23.206,88.631 ccw(c-23.206,89.601) CON301.S1@-22.52,88.915 CON301.B1A12@-21.45,88 ; CON301.A1B12@-14.95,88 CON301.S1@-13.88,88.915 ccw(c-13.194,89.601) -13.194,88.631 R303.2@-11.684,88.631 ; v1(-5.461,56.515) -2.776,53.83 cw(c-4.572,52.034) -2.032,52.034 -2.032,47.002 cw(c-4.572,47.002) -2.776,45.206 D302.3@-2.797,45.185
  Bottom Layer w0.254: S302.1@-116.042,13.19 -116.042,13.045 ccw(c-113.919,13.045) -113.919,10.922 cw(c-113.919,8.985) -111.996,9.216 -111.996,9.017 ccw(c-109.002,9.017) -111.982,8.729 ccw(c-109.002,9.017) -109.914,6.165 ccw(c-109.002,9.017) -109.002,6.023 -80.264,6.023 ccw(c-80.264,8.563) -78.043,7.33 cw(c-77.821,7.207) -78.032,7.348 ccw(c-80.518,9.017) -77.524,9.017 -77.524,14.732 cw(c-75.438,14.732) -75.438,16.818 -26.924,16.818 ccw(c-26.924,19.812) -23.93,19.812 -23.93,28.412 ccw(c-26.924,28.412) -24.158,29.558 ccw(c-26.924,28.412) -24.808,30.53 -29.542,35.264 cw(c-28.067,36.739) -30.153,36.739 -30.153,38.485 cw(c-28.86,38.485) v1(-29.774,39.4) cw(c-28.86,40.314) -30.153,40.314 -30.153,50.202 cw(c-27.613,50.202) -29.409,51.998 CON303.1@-28.067,53.34 ; CON301.S1@-13.88,89.915 -13.88,94.095
  other v1: -42.418,52.705 -39.751,55.499 -33.401,55.626 -7.366,56.388 -39.751,58.039 -19.812,58.039 -12.954,58.039 -33.401,58.166 -19.812,60.579 -12.954,60.579 -43.815,60.833 -35.306,62.103 -63.373,62.357 -9.939,62.401 -4.318,62.865 -1.778,62.865 -44.829,63.291 -40.894,65.913 -45.085,67.056 -4.191,73.025 -1.651,73.025 -17.526,74.93 -12.065,74.93 -19.477,76.186 -12.065,77.47 -17.653,79.629 -15.54,80.504 -20.574,82.677 -16.129,85.471 -19.685,92.456 -16.637,92.456
  other v2: -51.184,58.362 -52.74,59.918 -49.629,59.918 -51.184,61.474
LED: R307.2 U301.9 | length 94.7
  Component Side w0.254: v1(-65.151,49.403) -65.151,45.847 ccw(c-63.438,45.847) -63.438,44.134 -56.008,44.134 ccw(c-56.008,45.213) -55.245,44.45 cw(c-54.195,43.4) -54.195,44.885 -49.731,44.885 cw(c-49.731,42.725) -48.204,44.253 ccw(c-46.795,45.661) -46.795,43.669 -37.235,43.669 cw(c-37.235,41.129) -35.439,42.925 -31.231,38.717 ccw(c-29.435,40.513) -29.435,37.973 R307.2@-15.382,37.973 ; v1(-53.3,66.651) ccw(c-51.713,66.651) -52.835,65.529 U301.9@-52.174,64.868 cw(c-53.455,63.587) -51.644,63.587 U301.9@-51.644,62.852
  Bottom Layer w0.254: v1(-65.151,49.403) -65.931,50.183 cw(c-64.135,51.979) -66.675,51.979 -66.675,66.294 cw(c-64.135,66.294) -64.135,68.834 -56.678,68.834 cw(c-56.678,66.294) -54.882,68.09 -53.544,66.752 ccw(c-53.3,66.996) v1(-53.3,66.651) v1@-53.3,66.294
NetC301_2: C301.2 U301.27 | length 8.7
  Component Side w0.254: U301.27@-50.018,57.691 -49.657,57.33 cw(c-49.965,57.023) -49.53,57.023 ccw(c-48.428,57.023) -49.208,56.244 U301.27@-49.063,56.1 U301.27@-49.017,56.054 ; U301.27@-49.016,56.053 ccw(c-47.371,57.7) -47.371,55.372 -43.86,55.372 cw(c-43.86,53.638) C301.2@-42.634,54.864
NetC305_2: C305.2 U301.2 X301.3 | length 8.3
  Component Side w0.254: U301.2@-48.603,60.731 -48.418,60.916 cw(c-48.006,60.504) -48.006,61.087 -47.733,61.087 ccw(c-47.733,62.407) U301.2@-46.8,61.474 -46.788,61.486 cw(c-44.992,59.69) -44.992,62.23 -44.508,62.23 ccw(c-44.508,64.134) X301.3@-43.162,62.788 -43.162,63.228 C305.2@-44.45,64.516
NetC306_2: C306.2 U301.1 X301.1 | length 13.2
  Component Side w0.254: U301.1@-48.25,60.378 -47.515,60.378 ccw(c-47.515,62.188) U301.1@-46.235,60.908 -45.761,60.434 ccw(c-43.964,62.23) -43.964,59.69 -42.173,59.69 ccw(c-42.173,61.858) -40.641,60.324 ccw(c-42.173,61.858) -40.64,60.325 -40.544,60.421 ccw(c-41.845,61.722) -40.005,61.722 -40.005,62.035 X301.1@-40.404,62.434 -38.065,62.434 C306.2@-37.988,62.357
NetCON301_A5: CON301.A5 R303.1 | length 7.8
  Component Side w0.254: CON301.A5@-16.95,88 -16.95,89.349 cw(c-15.621,89.349) -15.621,90.678 -12.431,90.678 cw(c-12.431,89.931) R303.1@-11.684,89.931
NetCON301_B5: CON301.B5 R304.1 | length 7.8
  Component Side w0.254: R304.1@-25.146,89.931 cw(c-24.399,89.931) -24.399,90.678 -21.463,90.678 cw(c-21.463,89.154) -19.939,89.154 -19.939,88 CON301.B5@-19.95,88 CON301.B5@-19.95,88.138
NetD201_1: D201.1 S201.1 | length 54.6
  Component Side w0.254: D201.1@-42.418,82.635 cw(c-40.979,82.635) -40.979,84.074 -38.735,84.074 ccw(c-38.735,85.217) -37.592,85.217 -37.592,88.9 cw(c-35.052,88.9) -35.052,91.44 -12.736,91.44 cw(c-12.736,88.9) -10.94,90.696 -10.396,90.152 ccw(c-8.6,91.948) -8.6,89.408 -8.128,89.408 ; -7.838,89.408 -5.146,89.408 cw(c-5.146,87.122) -2.86,87.122 S201.1@-2.86,80.335
NetD202_1: D202.1 S202.1 | length 4.2
  Component Side w0.254: D202.1@-39.878,82.635 -36.339,82.635 ccw(c-36.339,83.454) S202.1@-35.76,82.875
NetD203_1: D203.1 S203.1 | length 6.1
  Component Side w0.254: D203.1@-55.499,85.05 -55.499,87.484 cw(c-52.959,87.484) -54.755,89.28 S203.1@-53.54,90.495
NetD204_1: D204.1 S204.1 | length 3.1
  Component Side w0.254: S204.1@-58.74,87.955 cw(c-60.126,86.569) -58.166,86.569 D204.1@-58.166,85.05
NetD205_1: D205.1 S205.1 | length 7.7
  Component Side w0.254: D205.1@-94.996,85.05 -94.996,87.955 cw(c-92.456,87.955) -92.456,90.495 S205.1@-91.64,90.495
NetD206_1: D206.1 S206.1 | length 7.6
  Component Side w0.254: D206.1@-113.919,85.05 -113.919,87.955 cw(c-111.379,87.955) -111.379,90.495 S206.1@-110.69,90.495
NetD207_1: D207.1 S207.1 | length 7.6
  Component Side w0.254: D207.1@-132.969,85.05 -132.969,87.955 cw(c-130.429,87.955) -130.429,90.495 S207.1@-129.74,90.495
NetD208_1: D208.1 S208.1 | length 7.6
  Component Side w0.254: D208.1@-152.019,85.05 -152.019,87.955 cw(c-149.479,87.955) -149.479,90.495 S208.1@-148.79,90.495
NetD209_1: D209.1 S209.1 | length 7.6
  Component Side w0.254: D209.1@-171.069,85.05 -171.069,87.955 cw(c-168.529,87.955) -168.529,90.495 S209.1@-167.84,90.495
NetD210_1: D210.1 S210.1 | length 23.8
  Component Side w0.254: D210.1@-207.772,85.05 cw(c-205.319,85.05) -205.319,87.503 -202.601,87.503 ccw(c-202.601,90.043) -200.805,88.247 -198.61,90.442 cw(c-196.814,88.646) -196.814,91.186 -188.558,91.186 cw(c-188.558,88.827) S210.1@-186.89,90.495
NetD211_1: D211.1 S211.1 | length 8.4
  Component Side w0.254: D211.1@-210.693,85.05 ccw(c-210.693,86.701) -209.042,86.701 -209.042,87.955 cw(c-206.502,87.955) -206.502,90.495 S211.1@-205.94,90.495
NetD212_1: D212.1 S212.1 | length 7.6
  Component Side w0.254: D212.1@-228.219,85.05 -228.219,87.955 cw(c-225.679,87.955) -225.679,90.495 S212.1@-224.99,90.495
NetD213_1: D213.1 S213.1 | length 5.9
  Component Side w0.254: D213.1@-244.856,85.05 -244.856,89.679 cw(c-244.04,89.679) S213.1@-244.04,90.495
NetD214_1: D214.1 S214.1 | length 6.9
  Component Side w0.254: S214.1@-250.51,80.335 -250.51,82.51 cw(c-247.97,82.51) -247.97,85.05 D214.1@-247.269,85.05
NetD215_1: D215.1 S215.1 | length 8.4
  Component Side w0.254: D215.1@-24.511,76.635 -22.742,76.635 cw(c-22.742,74.095) -20.202,74.095 S215.1@-20.202,71.445
NetD216_1: D216.1 S216.1 | length 9.8
  Component Side w0.254: S216.1@-30.165,68.905 -30.165,74.095 cw(c-27.625,74.095) -27.625,76.635 D216.1@-27.051,76.635
NetD217_1: D217.1 S217.1 | length 3.4
  Component Side w0.254: D217.1@-65.405,68.945 S217.1@-63.065,71.445
NetD218_1: D218.1 S218.1 | length 8.4
  Component Side w0.254: D218.1@-86.741,66 ccw(c-86.741,67.27) -85.471,67.27 -85.471,68.905 cw(c-82.931,68.905) -82.931,71.445 S218.1@-82.115,71.445
NetD219_1: D219.1 S219.1 | length 6
  Component Side w0.254: D219.1@-102.87,66 -102.87,68.688 cw(c-100.33,68.688) -102.126,70.484 S219.1@-101.165,71.445
NetD220_1: D220.1 S220.1 | length 3.3
  Component Side w0.254: S220.1@-106.365,68.905 cw(c-106.365,68.712) -106.172,68.712 -106.172,68.072 cw(c-106.172,67.564) -105.664,67.564 D220.1@-105.664,66
NetD221_1: D221.1 S221.1 | length 6.1
  Component Side w0.254: D221.1@-141.097,66 -141.097,68.561 cw(c-138.557,68.561) -140.353,70.357 S221.1@-139.265,71.445
NetD222_1: D222.1 S222.1 | length 3.1
  Component Side w0.254: S222.1@-144.465,68.905 cw(c-146.157,67.213) -143.764,67.213 D222.1@-143.764,66
NetD223_1: D223.1 S223.1 | length 7.6
  Component Side w0.254: D223.1@-180.594,66 -180.594,68.905 cw(c-178.054,68.905) -178.054,71.445 S223.1@-177.365,71.445